# EAGLE board Rev0 (EAGLE 6.5.0)
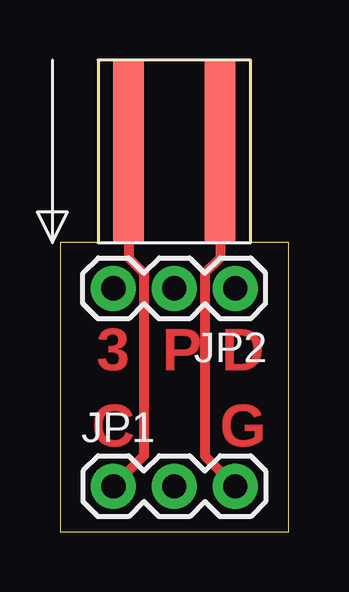
[diagram p0: board, top side]
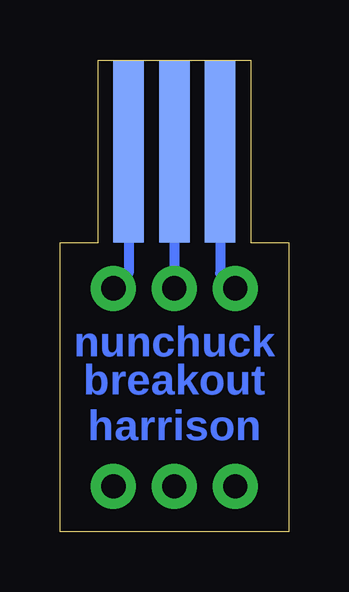
[diagram p1: board, bottom side, seen from below]

Size 9.53 x 19.68 mm. Coordinates in mm from the lower left corner, seen from the top.
Outline: 1.59,19.68 1.59,12.06 0,12.06 0,0 9.52,0 9.52,12.06 7.94,12.06 7.94,19.68 1.59,19.68
Copper layers (1*16): Top 0.035mm / dielectric 1.5mm / Bottom 0.035mm
Design rules "default": minimum track width 10mil, minimum drill 0.6mm, track to track 8mil, track to pad 8mil, pad to pad 8mil, via to via 8mil, smd to smd 8mil, copper to edge 40mil, drill to drill 8mil, minimum pad ring 10mil, minimum via ring 8mil, stop-mask expansion 4mil, vias tented up to drill 0mil, thermal gap 10mil

## Footprints (pad centres in the part's own frame; a part is rotated, then mirrored left to right if it is on the bottom)
1X03 = drill 1.016 pad 1.88: 1 0,0; 2 2.54,0; 3 5.08,0
NUNCHUCK-SIMPLE = smd 1.27 x 7.62 bottom: 3.3V -1.905,0; DATA 1.905,0; PRESENCE 0,0 | smd 1.27 x 7.62: CLK -1.905,0; GND 1.905,0

## Placement (x,y rotation side)
JP1  [1X03]  2.22,1.91 0 top
JP2  [1X03]  7.3,10.16 180 top
U$1  NUNCHUCK  [NUNCHUCK-SIMPLE]  4.76,15.88 0 top

## Library data of the parts
JP1 JP2 = SparkFun-Connectors
U$1 = HHJ

## Nets
3.3V: JP2.3 U$1.3.3V
CLK: JP1.1 U$1.CLK
DATA: JP2.1 U$1.DATA
GND: JP1.3 U$1.GND
PRESENCE: JP2.2 U$1.PRESENCE

## Tracks (layer width: path | path; a pad name or v marks a point on that pad's centre or on a via)
3.3V
  Bottom 0.406: U$1.3.3V 2.86,10.79 JP2.3
CLK
  Top 0.406: U$1.CLK 2.86,11.43 3.49,10.79 3.49,3.17 JP1.1
DATA
  Bottom 0.406: U$1.DATA 6.67,10.79 JP2.1
GND
  Top 0.406: U$1.GND 6.67,11.43 6.03,10.79 6.03,3.17 JP1.3
PRESENCE
  Bottom 0.406: U$1.PRESENCE JP2.2

## Text on the board
Top: 3 | P | D | C | G
Bottom: nunchuck | breakout | harrison